# Altium PCB LMAT_AMT_V2.PcbDoc (part 1 of 2)
Units mil, origin at the board's own origin, x right, y up, seen from the top; angles counter-clockwise.
Board outline 1437.01 x 1604.33 mil, 2 copper layers (Top Layer, Bottom Layer), stack 62.192 mil thick; 99 components, 45 nets, 234 pads, 108 vias.
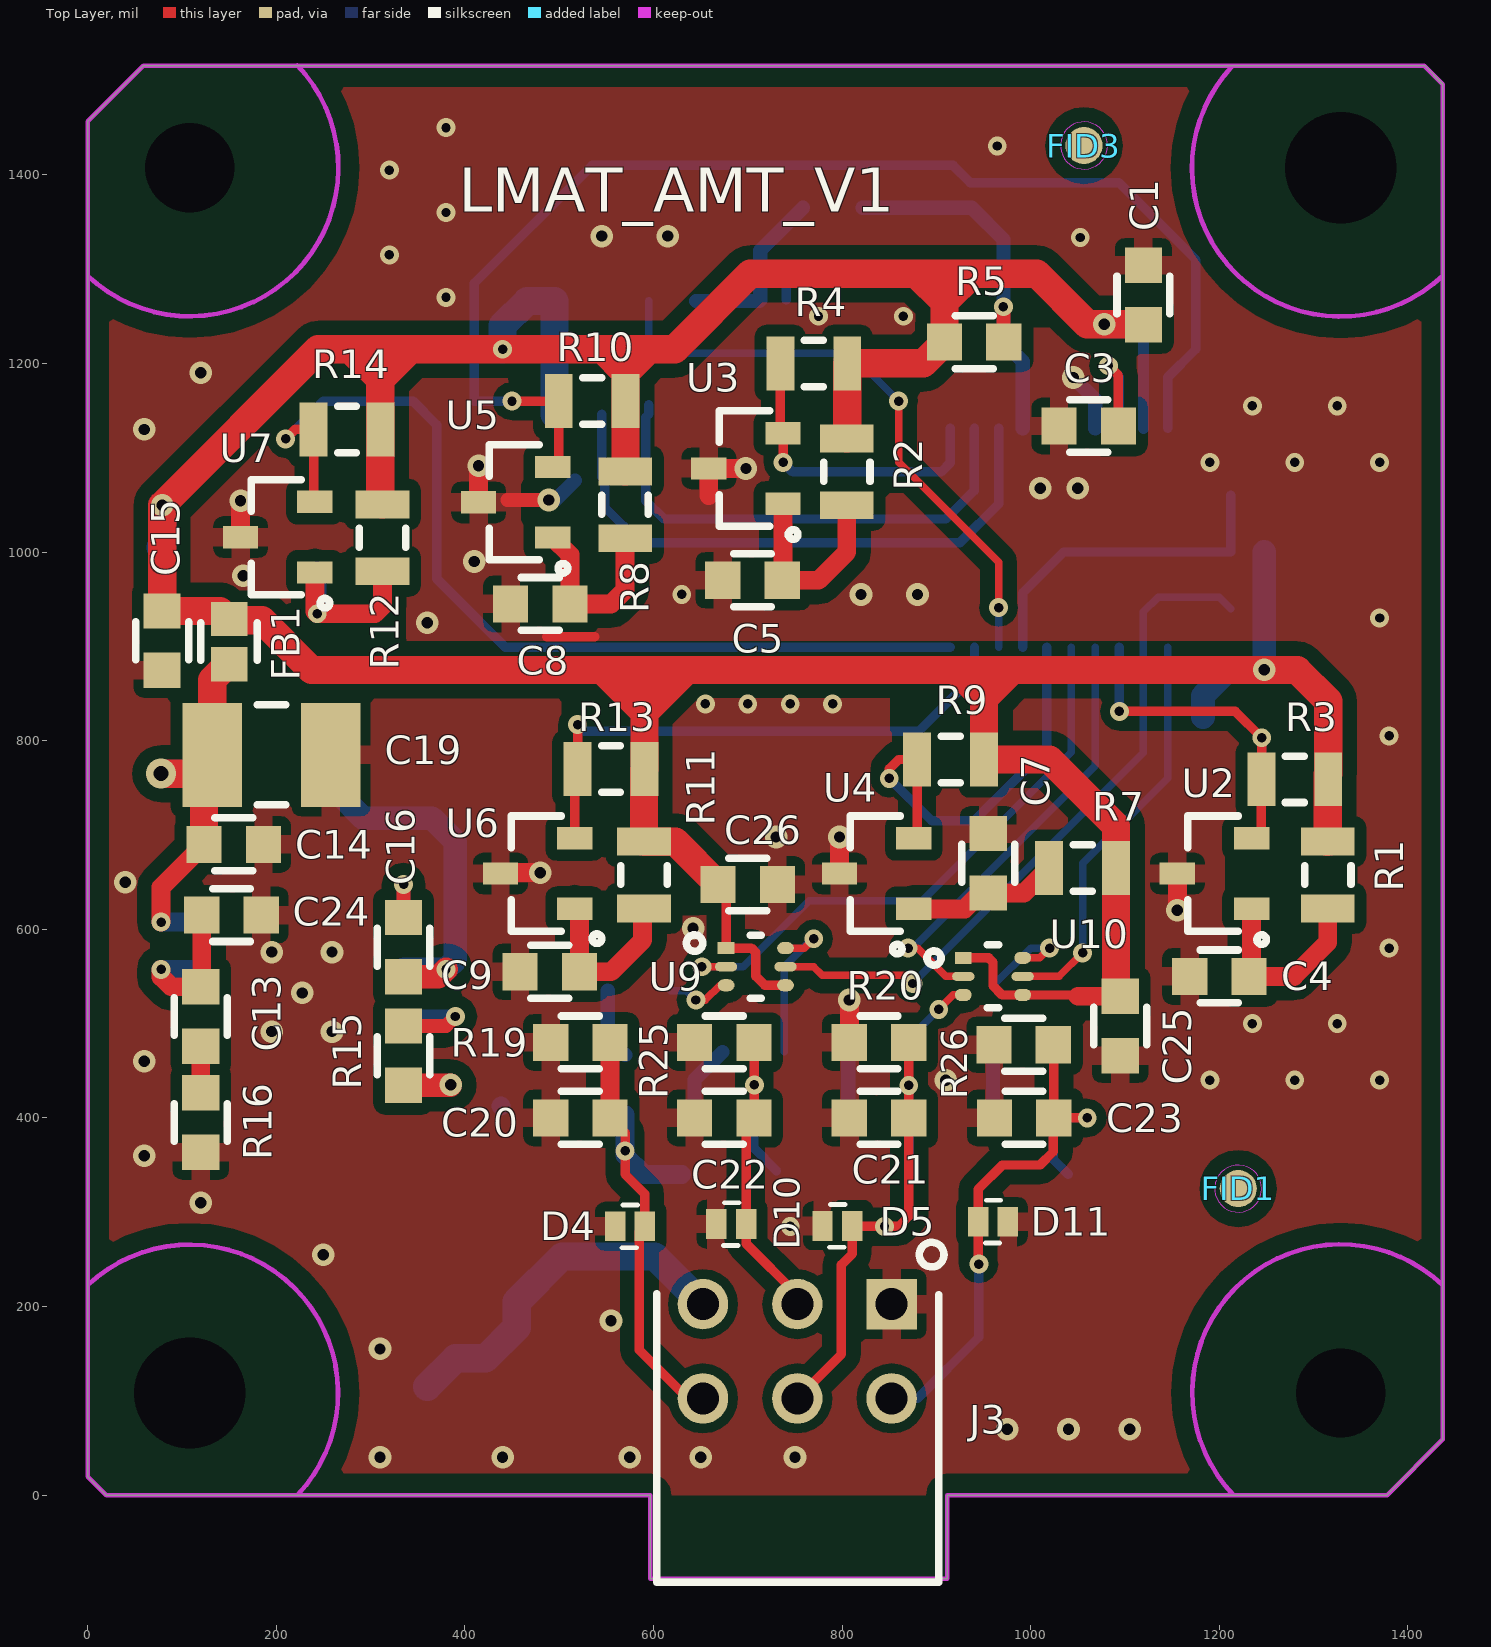
[diagram p0: Top Layer view]
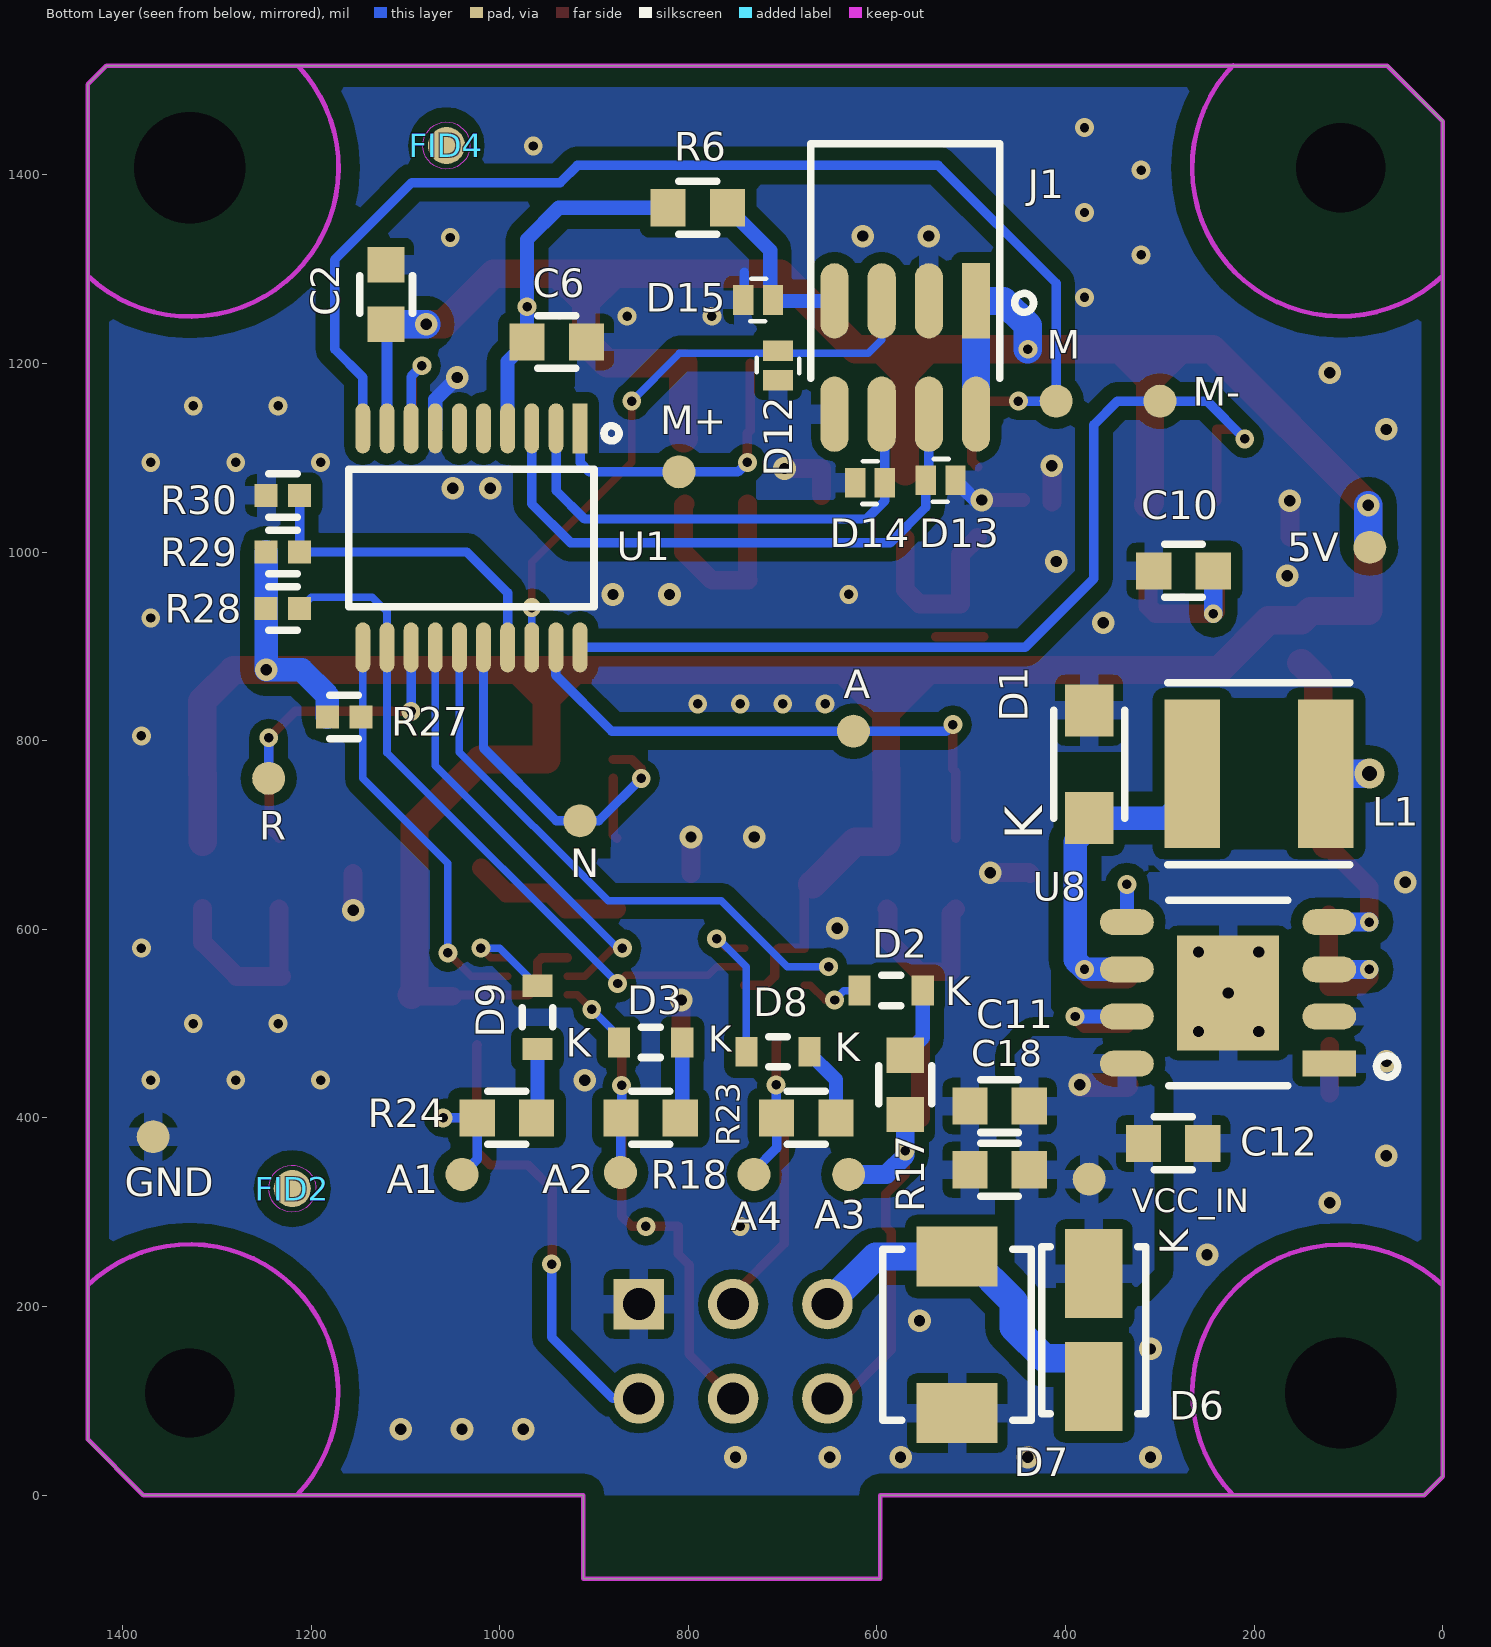
[diagram p1: Bottom Layer view, seen from below]
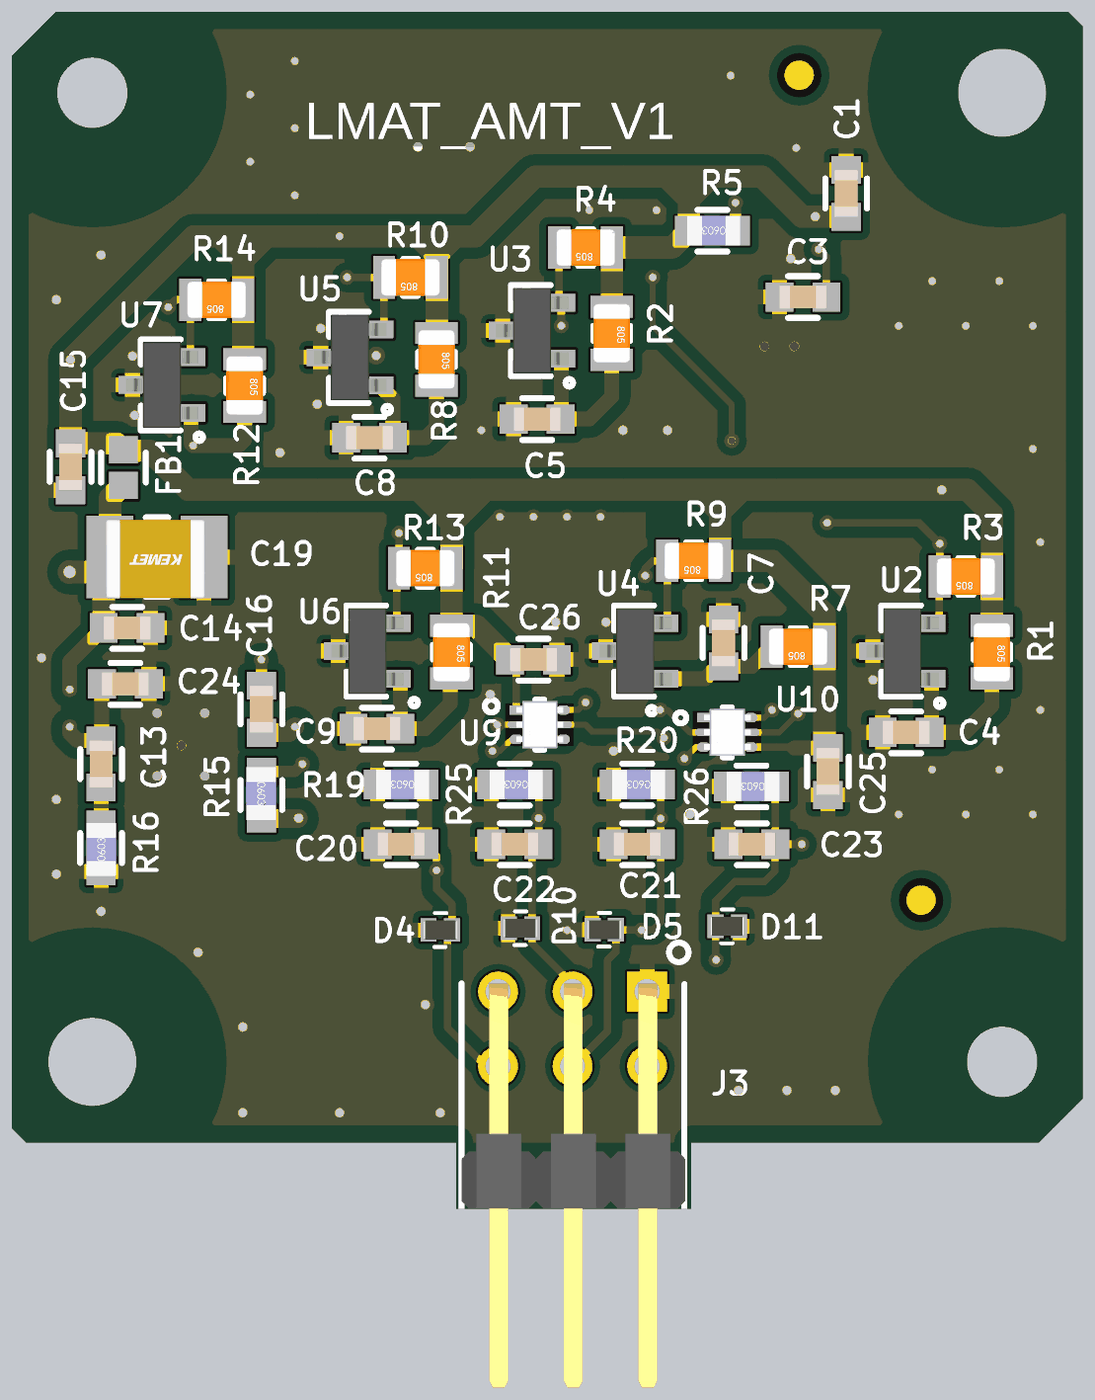
[diagram p3: 3D render of the assembled board from above, using the file's embedded part models]
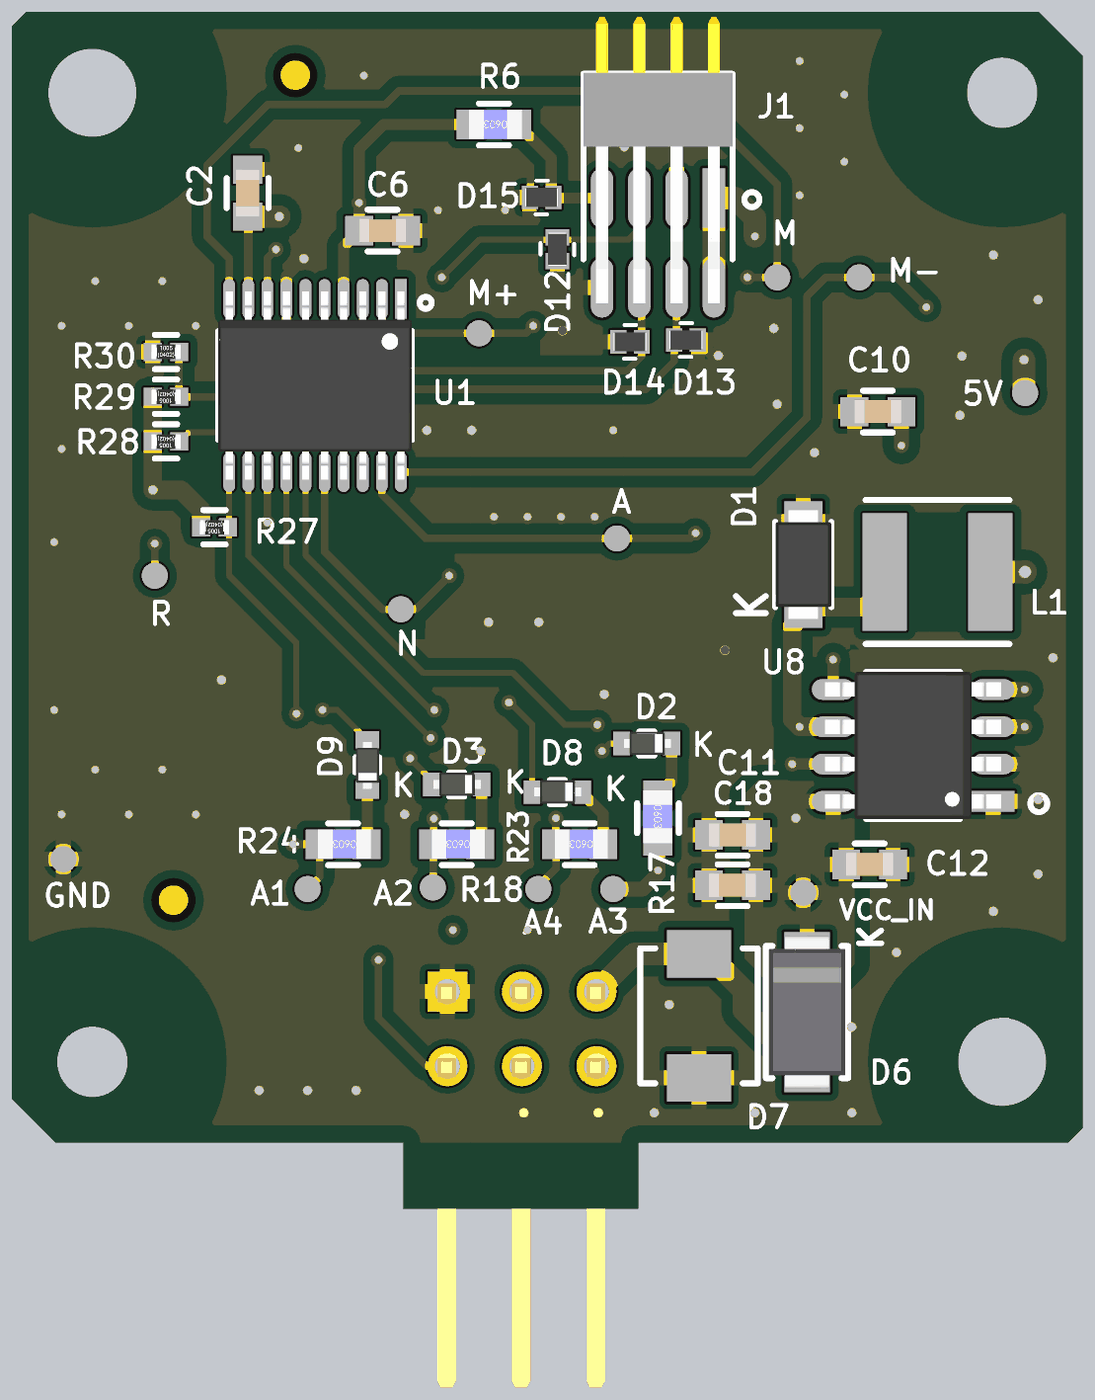
[diagram p4: 3D render of the assembled board from below, using the file's embedded part models]

## Layer stack, top to bottom
Top Solder: solder mask 0.4, Solder Resist, Dk 3.5
Top Layer: signal copper 1.4
Dielectric 1: core 59.392, FR-4, Dk 4.2
Bottom Layer: signal copper 1.4
Bottom solder: solder mask 0.4, Solder Resist, Dk 3.5

## Board outline
0,19.68 19.68,0 596.46,0 596.46,-88.58 911.42,-88.58 911.42,0 1377.95,0 1437.01,59.05 1437.01,1496.06 1417.32,1515.75 59.06,1515.75 0,1456.69

## Design rules (kind name [scope] priority, off if disabled: settings)
AcuteAngle [All] p1: minimum=6.00000000000000E+0001 checktracksonly=TRUE
Clearance Clearance_keepout [(OnLayer('Keep-Out Layer'))] p1: gap=30 ignorepadtopadclearanceinfootprint=TRUE except(0: Arc-Text Arc-Hole Track-Text Track-Hole SMDPad-Text SMDPad-Hole THPad-Text THPad-Hole Via-Text Via-Hole Fill-Text Fill-Hole Poly-Text Poly-Hole Region-Text Region-Hole Text-Text Text-Hole; 10: Arc-Track Arc-SMDPad Arc-THPad Arc-Via Track-Track Track-SMDPad Track-THPad Track-Via SMDPad-Region; 15: Arc-Arc; 20: Arc-Poly Track-Poly; 25: Fill-Fill Poly-Poly)
Clearance [All] p2: gap=15 ignorepadtopadclearanceinfootprint=TRUE except(0: Arc-Hole Track-Hole SMDPad-Hole THPad-Hole Via-Hole Fill-Hole Poly-Hole Region-Hole Text-Hole; 8: Arc-Track Track-SMDPad SMDPad-Via; 10: Track-Track Track-Via Track-Region SMDPad-SMDPad SMDPad-Region THPad-Poly THPad-Region Via-Poly Via-Region; 12: SMDPad-Poly; 20: Poly-Poly)
ComponentClearance [All] p1 off: gap=20 collisioncheckmode=3 verticalgap=20 showdistances=FALSE
FanoutControl Fanout_Default [All] p1: bgadir=Out bgaviamode=Centered fanoutstyle=Auto fanoutdirection=Alternating viagrid=1 // Fanout_Default (Default Rule)
Height Bottom [All] p1: minheight=0 maxheight=216.54 prefheight=196.85
Height TOP [All] p2: minheight=0 maxheight=62.99 prefheight=59.06
Height [All] p3: minheight=0 maxheight=393.7 prefheight=196.85
HoleSize [All] p1: absolutevalues=TRUE maxlimit=1000 minlimit=1 maxpercent=80.000 minpercent=20.000
HoleToHoleClearance [All] p1 off: gap=10 allowstackedmicrovias=TRUE
LayerPairs [All] p1 off: enforce=TRUE
MinimumAnnularRing [All] p1: minimumring=5
MinimumSolderMaskSliver [All] p1: minsoldermaskwidth=3
PolygonConnect PolygonConnect_Via [IsVia] p1: connectstyle=Direct reliefconductorwidth=10 reliefentries=4 polygonreliefangle="90 Angle" airgapwidth=10
PolygonConnect [All] p2: connectstyle=Relief reliefconductorwidth=20 reliefentries=4 polygonreliefangle="90 Angle" airgapwidth=10
RoomDefinition LMAT_AMT_V1 [InComponentClass('LMAT_AMT_V1')] p1: confinementstyle=ConfineIn formatcopy=TRUE lockcomponents=FALSE outline -39778.63,-10384.96 -37778.63,-10384.96 -37778.63,-9384.96 -39778.63,-9384.96
RoutingVias RoutingVias_PWR [InNetClass('PWR')] p1: holewidth=12 width=24 viastyle="Through Hole" minholewidth=12 minwidth=24 maxholewidth=20 maxwidth=40
RoutingVias [All] p2: holewidth=10 width=20 viastyle="Through Hole" minholewidth=10 minwidth=20 maxholewidth=20 maxwidth=40
SilkToSilkClearance [All] p1: silktosilkclearance=2
SilkToSolderMaskClearance [IsPad] p1: minsilkscreentomaskgap=2 clearancetoexposedcopper=TRUE
SolderMaskExpansion [All] p1: expansion=4
UnRoutedNet [All] p1: checkbadconnections=TRUE
UnpouredPolygon [All] p1: allowunpoured=TRUE allowshelved=TRUE
Width [All] p1: maxlimit=200 minlimit=8 preferedwidth=15
15 further rules are at their usual default settings.

## Classes and differential pairs
net class PWR: GND VCC_5V VCC_IN

## Components (designator, comment, footprint, x,y, rotation, side; value= is the part's Value field where it differs from the comment)
5V "Test Point- 35mil" TP_35M_DIA#1 77.5,1005 r180 bottom locked
A "Test Point- 35mil" TP_35M_DIA#2 967.5,1123.58 r180 bottom locked
A1 "Test Point- 35mil" TP_35M_DIA#1 1040,340 r180 bottom locked
A2 "Test Point- 35mil" TP_35M_DIA#1 872,342 r180 bottom locked
A3 "Test Point- 35mil" TP_35M_DIA#1 630,340 r180 bottom locked
A4 "Test Point- 35mil" TP_35M_DIA#1 730.45,340 r180 bottom locked
C1 "CAP CER 0.1UF 50V 10% X7R 0603" SMDC0603 1119.5,1272.5 r90 top locked value=DNP
C2 "CAP CER 1UF 25V X7R 0603" SMDC0603 1120.5,1273 r270 bottom locked value=1µF
C3 "CAP CER 1UF 25V X7R 0603" SMDC0603 1061.48,1133.64 r180 top locked value=1µF
C4 "CAP CER 0.047UF 50V X7R 0603" SMDC0603 1200,550 r0 top locked value=0.047µF
C5 "CAP CER 0.047UF 50V X7R 0603" SMDC0603 705,970 r0 top locked value=0.047µF
C6 "CAP CER 0.1UF 50V 10% X7R 0603" SMDC0603 939.5,1222.68 r180 bottom locked value=0.1uF
C7 "CAP CER 0.047UF 50V X7R 0603" SMDC0603 955,670 r270 top locked value=0.047µF
C8 "CAP CER 0.047UF 50V X7R 0603" SMDC0603 480,945 r0 top locked value=0.047µF
C9 "CAP CER 0.047UF 50V X7R 0603" SMDC0603 490,555 r0 top locked value=0.047µF
C10 "CAP CER 0.047UF 50V X7R 0603" SMDC0603 275,980 r180 bottom locked value=0.047µF
C11 "CAP CER 0.22UF 50V X7R 0603" SMDC0603 470,412.5 r180 bottom locked value=0.22µF
C12 "CAP CER 0.1UF 50V 10% X7R 0603" SMDC0603 286,373 r180 bottom locked value=0.1uF
C13 "CAP CER 0.022UF 50V 10% X7R 0603" SMDC0603 120,507.5 r270 top locked value=0.022uF
C14 "CAP CER 0.22UF 50V X7R 0603" SMDC0603 155,690 r180 top locked value=0.22µF
C15 "CAP CER 0.1UF 50V 10% X7R 0603" SMDC0603 79,906 r270 top locked value=DNP
C16 "CAP CER 0.22UF 50V X7R 0603" SMDC0603 335,581 r270 top locked value=0.22µF
C18 "CAP CER 0.1UF 50V 10% X7R 0603" SMDC0603 470,345 r0 bottom locked value=DNP
C19 "CAP CER 47UF 16V X6S 1210" SMDC1210 195,785 r180 top locked value=47uF
C20 "CAP CER 10000PF 50V X8R 0603" SMDC0603 522.5,400 r0 top locked value=DNP
C21 "CAP CER 10000PF 50V X8R 0603" SMDC0603 839.2,400 r0 top locked value=DNP
C22 "CAP CER 10000PF 50V X8R 0603" SMDC0603 675,400 r0 top locked value=DNP
C23 "CAP CER 10000PF 50V X8R 0603" SMDC0603 993,400 r0 top locked value=DNP
C24 "CAP CER 0.022UF 50V 10% X7R 0603" SMDC0603 152.5,615 r0 top locked value=DNP
C25 "CAP CER 0.1UF 50V 10% X7R 0603" SMDC0603 1095,497.5 r270 top locked value=0.1uF
C26 "CAP CER 0.1UF 50V 10% X7R 0603" SMDC0603 700,647.5 r0 top locked value=0.1uF
D1 "DIODE SCHOTTKY 40V 1A DO-219AB" SODFL370X110-2N 375,775 r90 bottom locked value=SS1FL4HM3/H
D2 "Diode Schottky 30V 100mA Surface Mount EMD2" SOD1700X70N-V2 585,535 r0 bottom locked value=RB501SM-30FHT2R
D3 "Diode Schottky 30V 100mA Surface Mount EMD2" SOD1700X70N-V2 840,480 r0 bottom locked value=RB501SM-30FHT2R
D4 "TVS DIODE 5.5V 14V 2X1SON" DFN65P100X65X45-2N 575,285 r0 top locked value=SZESD7410N2T5G
D5 "TVS DIODE 5.5V 14V 2X1SON" DFN65P100X65X45-2N 795,285.43 r0 top locked value=SZESD7410N2T5G
D6 "DIODE GEN PURP 1KV 1A DO214AC" DIOM4227X23N-2N 370,175 r270 bottom locked value=S1MHE3_A/I
D7 "TVS DIODE 23.1V 48.3V SMB" DIOM4336X26B 515,170 r90 bottom locked value=SM6T27CAY
D8 "Diode Schottky 30V 100mA Surface Mount EMD2" SOD1700X70N-V2 705,470 r0 bottom locked value=RB501SM-30FHT2R
D9 "Diode Schottky 30V 100mA Surface Mount EMD2" SOD1700X70N-V2 960,506.54 r90 bottom locked value=RB501SM-30FHT2R
D10 "TVS DIODE 5.5V 14V 2X1SON" DFN65P100X65X45-2N 682.5,287.43 r0 top locked value=SZESD7410N2T5G
D11 "TVS DIODE 5.5V 14V 2X1SON" DFN65P100X65X45-2N 960,290 r180 top locked value=SZESD7410N2T5G
D12 "TVS DIODE 5.5V 14V 2X1SON" DFN65P100X65X45-2N 705,1197.79 r90 bottom locked value=DNP
D13 "TVS DIODE 5.5V 14V 2X1SON" DFN65P100X65X45-2N 532.5,1076 r0 bottom locked value=DNP
D14 "TVS DIODE 5.5V 14V 2X1SON" DFN65P100X65X45-2N 607.5,1073.5 r180 bottom locked value=DNP
D15 "TVS DIODE 5.5V 14V 2X1SON" DFN65P100X65X45-2N 726,1267.2 r180 bottom locked value=DNP
FB1 "FERRITE BEAD 600 OHM 0603 1LN" SMDL0603 150,905 r90 top locked value=BLM18KG601SH1D
FID1 "FID40X40" FID40X40 1220,325 r90 top locked
FID2 "FID40X40" FID40X40 1220,325 r90 bottom locked
FID3 "FID40X40" FID40X40 1056.5,1431 r90 top locked
FID4 "FID40X40" FID40X40 1056.5,1431 r90 bottom locked
GND "Test Point- 35mil" TP_35M_DIA#1 1367.5,380 r90 bottom locked
J1 "CONN HEADER R/A 6POS 2.54MMCONN HEADER SMD R/A 8POS 1.27MM" HDRRA8W53P127_2X4_9754X251X343P 570,1206.22 r0 bottom locked value=FTSH-104-02-L-DH
J3 "CONN HEADER R/A 6POS 2.54MM" HDRRA6W86P254_2X3_1344X254X528P 752.5,152.5 r180 top locked value=M20-9950345
L1 "FIXED IND 47UH 700MA 422.5 MOHM" INDC4949X310N 195,765 r180 bottom locked value=47UH
M "Test Point- 35mil" TP_35M_DIA#1 410,1160 r90 bottom locked
M+ "Test Point- 35mil" TP_35M_DIA#3 465,770 r90 bottom locked
M- "Test Point- 35mil" TP_35M_DIA#4 1245,760 r90 bottom locked
N "Test Point- 35mil" TP_35M_DIA#1 915,715 r90 bottom locked
R "Test Point- 35mil" TP_35M_DIA#5 295,1160 r180 bottom locked
R1 "RES SMD 100 OHM 1% 1/2W 0805" SMDR0805 1315,657.5 r270 top locked value=100R
R2 "RES SMD 100 OHM 1% 1/2W 0805" SMDR0805 805,1085 r270 top locked value=100R
R3 "RES SMD 1.2K OHM 5% 1/2W 0805" SMDR0805 1280,759 r180 top locked value=1.2K
R4 "RES SMD 1.2K OHM 5% 1/2W 0805" SMDR0805 770,1200 r180 top locked value=1.2K
R5 "RES SMD 47K OHM 1% 1/10W 0603" SMDR0603 940,1222.5 r180 top locked value=47K
R6 "RES SMD 0.0OHM JUMPER 1/10W 0603" SMDR0603 790,1365 r0 bottom locked value=0R
R7 "RES SMD 100 OHM 1% 1/2W 0805" SMDR0805 1055,665 r180 top locked value=100R
R8 "RES SMD 100 OHM 1% 1/2W 0805" SMDR0805 570,1050 r270 top locked value=100R
R9 "RES SMD 1.2K OHM 5% 1/2W 0805" SMDR0805 915,780 r180 top locked value=1.2K
R10 "RES SMD 1.2K OHM 5% 1/2W 0805" SMDR0805 535,1160 r180 top locked value=1.2K
R11 "RES SMD 100 OHM 1% 1/2W 0805" SMDR0805 590,657.5 r270 top locked value=100R
R12 "RES SMD 100 OHM 1% 1/2W 0805" SMDR0805 312.5,1015 r270 top locked value=100R
R13 "RES SMD 1.2K OHM 5% 1/2W 0805" SMDR0805 555,770 r180 top locked value=1.2K
R14 "RES SMD 1.2K OHM 5% 1/2W 0805" SMDR0805 275,1130 r180 top locked value=1.2K
R15 "RES SMD 1M OHM 5% 1/10W 0603" SMDR0603 335,466 r270 top locked value=1M
R16 "RES SMD 22K OHM 1% 1/10W 0603" SMDR0603 120,395 r90 top locked value=22K
R17 "RES SMD 105 OHM 1% 1/10W 0603" SMDR0603 570,435 r270 bottom locked value="105 Ohms"
R18 "RES SMD 105 OHM 1% 1/10W 0603" SMDR0603 840,400 r0 bottom locked value="105 Ohms"
R19 "RES SMD 210 OHM 1% 1/10W 0603" SMDR0603 522.5,480 r180 top locked value="210 Ohms"
R20 "RES SMD 210 OHM 1% 1/10W 0603" SMDR0603 839.2,480 r180 top locked value="210 Ohms"
R23 "RES SMD 105 OHM 1% 1/10W 0603" SMDR0603 675,400 r0 bottom locked value="105 Ohms"
R24 "RES SMD 105 OHM 1% 1/10W 0603" SMDR0603 992.5,400 r0 bottom locked value="105 Ohms"
R25 "RES SMD 210 OHM 1% 1/10W 0603" SMDR0603 675,480 r180 top locked value="210 Ohms"
R26 "RES SMD 210 OHM 1% 1/10W 0603" SMDR0603 992.5,477.5 r180 top locked value="210 Ohms"
R27 "RES SMD 10K OHM 5% 1/10W 0402" SMDR0402 1165,825 r0 bottom locked value=10K
R28 "RES SMD 10K OHM 5% 1/10W 0402" SMDR0402 1230,940 r0 bottom locked value=10K
R29 "RES SMD 4.7K OHM 1% 1/10W 0402" SMDR0402 1230,1000 r0 bottom locked value=4.7K
R30 "RES SMD 4.7K OHM 1% 1/10W 0402" SMDR0402 1230,1060 r180 bottom locked value=DNP
U1 "IC MCU 8BIT 8KB FLASH 20TSSOP" SOP65P640X120-20N 1030,1015 r270 bottom locked value=STM8AF6223PCU
U2 "MAGNETIC SWITCH UNIPOLAR SOT23-3" SOT95P248X115-3N 1194.88,659.06 r180 top locked value=TLE49641MXTSA1
U3 "MAGNETIC SWITCH UNIPOLAR SOT23-3" SOT95P248X115-3N 698.03,1088.58 r180 top locked value=TLE49641MXTSA1
U4 "MAGNETIC SWITCH UNIPOLAR SOT23-3" SOT95P248X115-3N 836.61,659.06 r180 top locked value=TLE49641MXTSA1
U5 "MAGNETIC SWITCH UNIPOLAR SOT23-3" SOT95P248X115-3N 453.94,1052.76 r180 top locked value=TLE49641MXTSA1
U6 "MAGNETIC SWITCH UNIPOLAR SOT23-3" SOT95P248X115-3N 477.17,659.06 r180 top locked value=TLE49641MXTSA1
U7 "MAGNETIC SWITCH UNIPOLAR SOT23-3" SOT95P248X115-3N 201.57,1015.75 r180 top locked value=TLE49641MXTSA1
U8 "IC REG BUCK 5V 1.8A 8DSO" SOIC127P600X170_HS-9N 227.72,532.5 r0 bottom locked value=TLE8366EV50XUMA1
U9 "MOSFET 2P-CH 20V 0.55A SOT666" SOTFL50P160X60-6N 708.5,560.31 r0 top locked value=PMDT670UPE,115
U10 "MOSFET 2P-CH 20V 0.55A SOT666" SOTFL50P160X60-6N 960,550 r0 top locked value=PMDT670UPE,115
VCC_IN "Test Point- 35mil" TP_35M_DIA#1 375,335 r90 bottom locked

## Footprints (in the part's own frame and the unit in brackets; to place one, negate y for a bottom-side part, rotate by r counter-clockwise, add the part's x,y. Pads: shape width x height; smd on the part's side, far side on the other; paste and mask are expansions set on the pad)
DFN65P100X65X45-2N [mm] "DFN, 2-Leads, Body 0.60x1.00mm, Pitch 0.65mm, IPC Medium Density"
  rect 0.55x0.8 smd mask+0.076: 1(-0.4,0) 2(0.4,0)
  silkscreen extent -0.21,-0.58 0.21,0.58, body extent -0.56,-0.32 0.56,0.33, height 0.45
DIOM4227X23N-2N [mm] "Molded Diode, 2-Leads, Body 4.25x2.67mm, IPC Medium Density"
  rect 2.4x1.55 smd: 1(-1.525,0) 2(1.525,0)
  silkscreen extent -2.25,-1.4 2.25,1.4, body extent -2.6,-1.3 2.6,1.3, height 2.4
DIOM4336X26B [mm] "Molded Diode, 2-Leads, Body 4.32x3.63mm, IPC Low Density"
  rect 1.62x2.18 smd: 1(-2.11,0) 2(2.11,0)
  silkscreen extent -2.3,-2 2.3,2, body extent -2.52,-1.97 2.52,1.97, height 2.65
FID40X40 [mm]
  round 1 smd paste-2 mask+0.254: 0(0,0)
  Top Layer keep-out circle w0.025: c0,0 r0.635
HDRRA6W86P254_2X3_1344X254X528P [mm] "CONN HEADER R/A 6POS 2.54MM"
  rect 1.36x1.36 hole 0.86 mask+0.076: 1(-2.54,-1.27)
  round 1.36 hole 0.86 mask+0.076: 2(0,-1.27) 3(2.54,-1.27) 4(-2.54,1.27) 5(0,1.27) 6(2.54,1.27)
  silkscreen extent -3.95,-2.93 3.78,6.22, body extent -3.84,-1.55 3.78,12.21, height 4.54
HDRRA8W53P127_2X4_9754X251X343P [mm] "CONN HEADER SMD R/A 8POS 1.27MM"
  rect 0.76x2.03 smd: 1(-1.905,-1.525)
  oval 0.76x2.03 smd: 2(-1.905,1.525) 3(-0.635,-1.525) 4(-0.635,1.525) 5(0.635,-1.525) 6(0.635,1.525) 7(1.905,-1.525) 8(1.905,1.525)
  silkscreen extent -3.45,-5.76 2.54,0.56, body extent -2.54,-7.7 2.54,2.05, height 3.41
INDC4949X310N [mm] "NRS5030T2R2NMGJ,FIXED IND 6.8UH 2.3A 52 MOHM SMD"
  rect 1.5x4 smd mask+0.076: 1(-1.8,0) 2(1.8,0)
  Top Layer pour cut-out: -0.635,2.032 0.635,2.032 0.635,-2.032 -0.635,-2.032
  silkscreen extent -2.45,-2.45 2.45,2.45, body extent -2.45,-2.45 2.45,2.45, height 3.1
SMDC0603 [mm]
  rect 0.95x1 smd mask+0.076: 1(-0.8,0) 2(0.8,0)
  Top Layer pour cut-out: -0.203,0.559 -0.203,-0.584 0.203,-0.584 0.203,0.559
  silkscreen extent -0.51,-0.71 0.51,0.71, body extent -0.8,-0.4 0.8,0.4, height 0.81
SMDC1210 [mm] "GRM32ER71A476KE15L, CAP CER 47UF 10V X7R 1210"
  rect 1.6x2.8 smd mask+0.076: 1(-1.6,0) 2(1.6,0)
  Top Layer pour cut-out: -0.508,1.35 0.381,1.35 0.381,-1.35 -0.508,-1.35
  silkscreen extent -0.38,-1.35 0.38,1.35, body extent -1.65,-1.29 1.75,1.41, height 1.41
SMDL0603 [mm] "Chip Inductor, 2-Leads, Body 1.60x0.80mm, IPC Medium Density"
  rect 0.92x0.98 smd: 1(-0.61,0) 2(0.61,0)
  silkscreen extent -0.51,-0.76 0.51,0.76, body extent -0.87,-0.48 0.87,0.48, height 1
SMDR0402 [mm]
  rect 0.62x0.62 smd mask+0.076: 1(-0.45,0) 2(0.45,0)
  Top Layer pour cut-out: -0.102,0.381 0.076,0.381 0.076,-0.381 -0.102,-0.381
  silkscreen extent -0.38,-0.58 0.38,0.58, body extent -0.5,-0.25 0.5,0.25, height 0.35
SMDR0603 [mm]
  rect 0.95x1 smd mask+0.076: 1(-0.8,0) 2(0.8,0)
  Top Layer pour cut-out: -0.254,0.61 0.254,0.61 0.254,-0.61 -0.254,-0.61
  silkscreen extent -0.51,-0.71 0.51,0.71, body extent -0.95,-0.5 0.85,0.5, height 0.32
SMDR0805 [mm]
  rect 0.75x1.45 smd mask+0.076: 1(-0.9,0) 2(0.9,0)
  Top Layer pour cut-out: -0.381,0.787 0.406,0.787 0.406,-0.762 0.381,-0.787 -0.381,-0.787
  silkscreen extent -0.25,-0.63 0.25,0.63, body extent -1,-0.63 1,0.63, height 0.78
SOD1700X70N-V2 [mm]
  rect 0.6x0.8 smd mask+0.076: 1(-0.85,0) 2(0.85,0)
  silkscreen extent -0.25,-0.41 0.25,0.41, body extent -0.82,-0.41 0.78,0.39, height 0.7
SODFL370X110-2N [mm] "SODFL, 2-Leads, Body 1.80x3.70mm, IPC Medium Density"
  rect 1.4x1.3 smd: 1(1.45,0) 2(-1.45,0)
  Top Layer pour cut-out: -0.395,-0.95 -0.395,0.95 0.316,0.95 0.316,-0.95
  silkscreen extent -1.45,-0.96 1.45,0.96, body extent -1.85,-0.95 1.85,0.95, height 1.1
SOIC127P600X170_HS-9N [mm] "SOIC, 8-Leads, Body 4.90x3.90mm, Pitch 1.27mm, Thermal Pad 3.10x2.75mm, IPC Medium Density"
  rect 1.45x0.7 smd: 1(-2.725,1.905)
  oval 1.45x0.7 smd: 2(-2.725,0.635) 3(-2.725,-0.635) 4(-2.725,-1.905) 5(2.725,-1.905) 6(2.725,-0.635) 7(2.725,0.635) 8(2.725,1.905)
  rect 2.75x3.1 smd paste-3 mask+0.102: 9(0,0)
  silkscreen extent -4.57,-2.5 1.6,2.5, body extent -3,-2.5 3,2.5, height 1.7
SOP65P640X120-20N [mm] "TSOP, 20-Leads, Body 6.50x4.40mm, Pitch 0.65mm, IPC Medium Density"
  rect 1.35x0.4 smd mask+0.076: 1(-2.95,2.925)
  oval 1.35x0.4 smd mask+0.076: 2(-2.95,2.275) 3(-2.95,1.625) 4(-2.95,0.975) 5(-2.95,0.325) 6(-2.95,-0.325) 7(-2.95,-0.975) 8(-2.95,-1.625) 9(-2.95,-2.275) 10(-2.95,-2.925) 11(2.95,-2.925) 12(2.95,-2.275) 13(2.95,-1.625) 14(2.95,-0.975) 15(2.95,-0.325) 16(2.95,0.325) 17(2.95,0.975) 18(2.95,1.625) 19(2.95,2.275) 20(2.95,2.925)
  silkscreen extent -3.02,-3.3 1.85,3.97, body extent -3.2,-3.3 3.2,3.3, height 1.2
SOT95P248X115-3N [mm] "SOT23, 3-Leads, Body 2.95x2.48mm, Pitch 0.95mm, IPC Medium Density"
  rect 0.95x0.6 smd: 1(-1,0.95) 2(-1,-0.95) 3(1,0)
  silkscreen extent -1.4,-1.55 0.71,1.9, body extent -1.25,-1.46 1.23,1.46, height 1.03
SOTFL50P160X60-6N [mm] "SOTFL, 6-Leads, Body 1.60x1.60mm, Pitch 0.50mm, IPC Medium Density"
  rect 0.45x0.325 smd mask+0.076: 1(-0.8,0.5)
  oval 0.6x0.25 smd mask+0.076: 2(-0.8,0) 5(0.8,0)
  oval 0.45x0.325 smd mask+0.076: 3(-0.8,-0.5) 4(0.8,-0.5) 6(0.8,0.5)
  silkscreen extent -1.87,-0.85 0.15,0.86, body extent -0.8,-0.8 0.8,0.8, height 0.57
TP_35M_DIA#1 [mil]
  round 35 smd mask+3: 1(0,0)
TP_35M_DIA#2 [mil]
  round 35 smd mask+3: 1(342.5,-313.58)
TP_35M_DIA#3 [mil]
  round 35 smd mask+3: 1(315,345)
TP_35M_DIA#4 [mil]
  round 35 smd mask+3: 1(400,-945)
TP_35M_DIA#5 [mil]
  round 35 smd mask+3: 1(-950,-400)

## Part data
5V A A1 A2 A3 A4 GND M M+ M- N R VCC_IN: library part EMS-TP35MIL-S, Internal Part Number=EMS-TP35MIL-S, Part Type="Test Point- 35mil"
C1 C6 C12 C15 C18 C25 C26: library part ECA0U10K50V0-SC, Manufacturer="TDK Corporation", Manufacturer Part Number=CGA3E2X7R1H104K080AA, Temp Co=X7R, Vendor Part Number=445-5666-1-ND, 1st Auxiliary Field=50V, 2nd Auxiliary Field=±10%, 3rd Auxiliary Field="RoHS Compliant", Component Height (mm)=0.90mm, Internal Part Number=ECA0U10K50V0-SC, Part Type="CAP CER 0.1UF 50V X7R 0603", Vendor Name=Digi-Key
C2 C3: library part ECA1U00L25V0-SC, Manufacturer="TDK Corporation", Manufacturer Part Number=CGA3E1X7R1E105K080AE, Temp Co="-55°C ~ 125°C", Vendor Part Number=445-173628-1-ND, 1st Auxiliary Field=25V, 2nd Auxiliary Field=±10%, 3rd Auxiliary Field="RoHS Compliant", Component Height (mm)=0.95mm, Internal Part Number=ECA1U00L25V0-SC, Part Type="CAP CER 1UF 25V X7R 0603", Vendor Name=Digi-Key
C4 C5 C7 C8 C9 C10: library part ECA47N0L50V-SC, Manufacturer="TDK Corporation", Manufacturer Part Number=CGA3E2X7R1H473K080AA, Temp Co="-55°C ~ 125°C", Vendor Part Number=445-5664-1-ND, 1st Auxiliary Field=50V, 2nd Auxiliary Field=±10%, 3rd Auxiliary Field="RoHS Compliant", Component Height (mm)=0.9mm, Internal Part Number=ECA47N0L50V-SC, Part Type="CAP CER 0.047UF 50V X7R 0603", Vendor Name=Digi-Key
C11 C14 C16: library part ECA0U22L50V0-SC, Manufacturer="Murata Electronics North America", Manufacturer Part Number=GCJ188R71H224KA01D, Temp Co="-55°C ~ 125°C", Vendor Part Number=490-14410-1-ND, 1st Auxiliary Field=50V, 2nd Auxiliary Field=±10%, 3rd Auxiliary Field="RoHS Compliant", Component Height (mm)=0.90mm, Internal Part Number=ECA0U22L50V0-SC, Part Type="CAP CER 0.22UF 50V X7R 0603", Vendor Name=Digi-Key
C13 C24: library part ECA0U022K50V0-SC, Manufacturer="TDK Corporation", Manufacturer Part Number=CGA3E2X7R1H223K080AA, Temp Co=X7R, Vendor Part Number=445-5663-1-ND, 1st Auxiliary Field=50V, 2nd Auxiliary Field=±10%, Component Height (mm)=0.90mm, Internal Part Number=ECA0U022K50V0-SC, Part Type="CAP CER 0.022UF 50V X7R 0603", Vendor Name=Digi-Key
C19: library part ECA47U0L16V0-SH, Manufacturer="Murata Electronics North America", Manufacturer Part Number=GRT32EC81C476KE13L, Temp Co="-55°C ~ 105°C", Vendor Part Number=490-12494-1-ND, 1st Auxiliary Field=16V, 2nd Auxiliary Field=±10%, 3rd Auxiliary Field="RoHS Compliant", 4th Auxiliary Field=AEC-Q200, Component Height (mm)=2.70mm, Internal Part Number=ECA47U0L16V0-SH, Part Type="CAP CER 47UF 16V X6S 1210", Vendor Name=Digi-Key
C20 C21 C22 C23: library part ECA0U01L50V0-SC, Manufacturer="TDK Corporation", Manufacturer Part Number=CGA3E2X8R1H103K080AA, Temp Co="-55°C ~ 150°C", Vendor Part Number=445-5892-1-ND, 1st Auxiliary Field=50V, 2nd Auxiliary Field=±10%, 3rd Auxiliary Field="RoHS Compliant", 4th Auxiliary Field=AEC-Q200, Component Height (mm)=0.80mm, Internal Part Number=ECA0U01L50V0-SC, Part Type="CAP CER 10000PF 50V X8R 0603", Vendor Name=Digi-Key
D1: library part EDDVS1A0040V0-S, Manufacturer="Vishay Semiconductor Diodes Division", Manufacturer Part Number=SS1FL4HM3/H, Temp Co="-55°C ~ 150°C", Vendor Part Number=SS1FL4HM3/HGICT-ND, 1st Auxiliary Field=40V, 2nd Auxiliary Field=1A, 3rd Auxiliary Field="RoHS Compliant", Component Height (mm)=1.08mm, Internal Part Number=EDDVS1A0040V0-S, Part Type="DIODE SCHOTTKY 40V 1A DO-219AB", Vendor Name=Digi-Key
D2 D3 D8 D9: library part EDDR0A1030V0-S, Manufacturer="Rohm Semiconductor", Manufacturer Part Number=RB501SM-30FHT2R, Temp Co="125°C (Max)", Vendor Part Number=RB501SM-30FHT2RCT-ND, 1st Auxiliary Field=30V, 2nd Auxiliary Field=100mA, 3rd Auxiliary Field="RoHS Compliant", Component Height (mm)=0.70mm, Internal Part Number=EDDR0A1030V0-S, Part Type="Diode Schottky 30V 100mA Surface Mount EMD2", Vendor Name=Digi-Key
D4 D5 D10 D11 D12 D13 D14 D15: library part EDDOS16A010V0-S, "TVS DIODE 8V 20V 2X2DFN", Manufacturer="ON Semiconductor", Manufacturer Part Number=SZESD7410N2T5G, Temp Co="-55°C ~ 150°C (TJ)", Vendor Part Number=SZESD7410N2T5GOSCT-ND, 1st Auxiliary Field=10V, 2nd Auxiliary Field=16A, 3rd Auxiliary Field="RoHS Compliant", 4th Auxiliary Field=AEC-Q101, Component Height (mm)=0.40mm, Internal Part Number=EDDOS16A010V0-S, Part Type="TVS DIODE 8V 20V 2X2DFN", Vendor Name=Digi-Key
D6: library part EDDVS1A001000V-S, Manufacturer="Vishay Semiconductor Diodes Division", Manufacturer Part Number=S1MHE3_A/I, Temp Co="-55°C ~ 150°C", Vendor Part Number=S1MHE3_A/IGICT-ND, 1st Auxiliary Field=1000V, 2nd Auxiliary Field=1A, 3rd Auxiliary Field="RoHS Compliant", Component Height (mm)=2.29mm, Internal Part Number=EDDVS1A001000V-S, Part Type="DIODE GEN PURP 1KV 1A DO214AC", Vendor Name=Digi-Key
D7: library part EDDST83A025V7-S, Manufacturer=STMicroelectronics, Manufacturer Part Number=SM6T27CAY, Temp Co="-55°C ~ 150°C (TJ)", Vendor Part Number=497-10798-1-ND, 1st Auxiliary Field=25.7V, 2nd Auxiliary Field=600W, 3rd Auxiliary Field="RoHS Compliant", Component Height (mm)=2.65mm, Internal Part Number=EDDST83A025V7-S, Part Type="TVS DIODE 23.1V 48.3V SMB", Vendor Name=Digi-Key
FB1: library part EIN600R1A30-S, Manufacturer="Murata Electronics North America", Manufacturer Part Number=BLM18KG601SH1D, Temp Co="-55°C ~ 125°C", Vendor Part Number=490-13259-1-ND, 1st Auxiliary Field="150 mOhm", 2nd Auxiliary Field=1.3A, 3rd Auxiliary Field="RoHS Compliant", 4th Auxiliary Field=AEC-Q200, Component Height (mm)=0.95mm, Internal Part Number=EIN600R1A30-S, Part Type="FERRITE BEAD 600 OHM 0603 1LN", Vendor Name=Digi-Key
FID1 FID2 FID3 FID4: library part FID_40X40
J1: library part ECN-FTSH-104-02-L-DH-0005, "CONN HEADER SMD R/A 8POS 1.27MM", Manufacturer="Samtec Inc.", Manufacturer Part Number=FTSH-104-02-L-DH, Temp Co="-55°C ~ 125°C", Vendor Part Number=SAM11248-ND, 1st Auxiliary Field=8POS, 2nd Auxiliary Field="2 rows", 3rd Auxiliary Field="RoHS Compliant", Component Height (mm)=3.43mm, Internal Part Number=ECN-FTSH-104-02-L-DH-0005, Part Type="CONN HEADER SMD R/A 8POS 1.27MM", Vendor Name=Digi-Key
J3: library part ECN-M20-9950345-0003, Manufacturer="Harwin Inc.", Manufacturer Part Number=M20-9950345, Temp Co="-40°C ~ 105°C", Vendor Part Number=952-2092-ND, 1st Auxiliary Field=6pos, 2nd Auxiliary Field="2 rows", 3rd Auxiliary Field="RoHS Compliant", Component Height (mm)=5.08mm, Internal Part Number=ECN-M20-9950345-0003, Part Type="CONN HEADER R/A 6POS 2.54MM", Vendor Name=Digi-Key
L1: library part EIN47U0N950M-S, Manufacturer="Taiyo Yuden", Manufacturer Part Number=NRS5030T470MMGJV, Temp Co="-40°C ~ 125°C", Vendor Part Number=587-3604-1-ND, 1st Auxiliary Field=950mA, 2nd Auxiliary Field=±20%, 3rd Auxiliary Field="RoHS Compliant", 4th Auxiliary Field=AEC-Q200, Component Height (mm)=3.00mm, Internal Part Number=EIN47U0N950M-S, Part Type="FIXED IND 47UH 700MA 422.5 MOHM", Vendor Name=Digi-Key
R1 R2 R7 R8 R11 R12: library part ERE100RG120-SE, Manufacturer="Panasonic Electronic Components", Manufacturer Part Number=ERJ-P06F1000V, Temp Co="-55°C ~ 155°C", Vendor Part Number=P16057CT-ND, 1st Auxiliary Field=0.5W, 2nd Auxiliary Field=±1%, 3rd Auxiliary Field="RoHS Compliant", 4th Auxiliary Field=AEC-Q200, Component Height (mm)=0.70mm, Internal Part Number=ERE100RG120-SE, Part Type="RES SMD 100 OHM 1% 1/2W 0805", Vendor Name=Digi-Key
R3 R4 R9 R10 R13 R14: library part ERE1K20G102-SE, Manufacturer="Panasonic Electronic Components", Manufacturer Part Number=ERJ-P06J122V, Temp Co="-55°C ~ 155°C", Vendor Part Number=P1.2KADCT-ND, 1st Auxiliary Field=0.5W, 2nd Auxiliary Field=±5%, 3rd Auxiliary Field="RoHS Compliant", Component Height (mm)=0.70mm, Internal Part Number=ERE1K20G102-SE, Part Type="RES SMD 1.2K OHM 5% 1/2W 0805", Vendor Name=Digi-Key
R5: library part ERE47K0G110-SC, Manufacturer=Yageo, Manufacturer Part Number=AT0603FRE0747KL, Temp Co="-55°C ~ 155°C", Vendor Part Number=YAG2129CT-ND, 1st Auxiliary Field=0.1W, 2nd Auxiliary Field=±1%, 3rd Auxiliary Field="RoHS Compliant", Component Height (mm)=0.55mm, Internal Part Number=ERE47K0G110-SC, Part Type="RES SMD 47K OHM 1% 1/10W 0603", Vendor Name=Digi-Key
R6: library part ERE0R00110-SC, Manufacturer="Panasonic Electronic Components", Manufacturer Part Number=ERJ-3GEY0R00V, Vendor Part Number=P0.0GCT-ND, 1st Auxiliary Field=0.1W, 2nd Auxiliary Field=Jumper, Component Height (mm)=0.55mm, Internal Part Number=ERE0R00110-SC, Part Type="RES SMD 0.0OHM JUMPER 1/10W 0603", Vendor Name=Digi-Key
R15: library part ERE1M00K110-SC, Manufacturer="Vishay Dale", Manufacturer Part Number=RCA06031M00JNEA, Temp Co="-55°C ~ 155°C", Vendor Part Number=541-2216-1-ND, 1st Auxiliary Field=0.1W, 2nd Auxiliary Field=±5%, 3rd Auxiliary Field="RoHS Compliant", 4th Auxiliary Field=AEC-Q200, Component Height (mm)=0.50mm, Internal Part Number=ERE1M00K110-SC, Part Type="RES SMD 1M OHM 5% 1/10W 0603", Vendor Name=Digi-Key
R16: library part ERE22K0G110-SC, Manufacturer="Panasonic Electronic Components", Manufacturer Part Number=ERJ-3EKF2202V, Temp Co="-55°C ~ 155°C", Vendor Part Number=P22.0KHCT-ND, 1st Auxiliary Field=0.1W, 2nd Auxiliary Field=±1%, 3rd Auxiliary Field="RoHS Compliant", 4th Auxiliary Field=AEC-Q200, Component Height (mm)=0.55mm, Internal Part Number=ERE22K0G110-SC, Part Type="RES SMD 22K OHM 1% 1/10W 0603", Vendor Name=Digi-Key
R17 R18 R23 R24: library part ERE105RG110-SC, Manufacturer="Panasonic Electronic Components", Manufacturer Part Number=ERJ-3EKF1050V, Temp Co="-55°C ~ 155°C", Vendor Part Number=P105HCT-ND, 1st Auxiliary Field=0.1W, 2nd Auxiliary Field=±1%, 3rd Auxiliary Field="RoHS Compliant", 4th Auxiliary Field=AEC-Q200, Component Height (mm)=0.55mm, Internal Part Number=ERE105RG110-SC, Part Type="RES SMD 105 OHM 1% 1/10W 0603", Vendor Name=Digi-Key
R19 R20 R25 R26: library part ERE210RG110-SC, Manufacturer="Panasonic Electronic Components", Manufacturer Part Number=ERJ-3EKF2100V, Temp Co="-55°C ~ 155°C", Vendor Part Number=P210HCT-ND, 1st Auxiliary Field=0.1W, 2nd Auxiliary Field=±1%, 3rd Auxiliary Field="RoHS Compliant", 4th Auxiliary Field=AEC-Q200, Component Height (mm)=0.55mm, Internal Part Number=ERE210RG110-SC, Part Type="RES SMD 210 OHM 1% 1/10W 0603", Vendor Name=Digi-Key
R27 R28: library part ERE10K0K110-SB, Manufacturer="Panasonic Electronic Components", Manufacturer Part Number=ERJ-2GEJ103X, Temp Co=±200ppm/°C, Vendor Part Number=P10KJCT-ND, 1st Auxiliary Field=0.1W, 2nd Auxiliary Field=±5%, 3rd Auxiliary Field="RoHS Compliant", Component Height (mm)=0.40mm, Internal Part Number=ERE10K0K110-SB, Part Type="RES SMD 10K OHM 5% 1/10W 0402", Vendor Name=Digi-Key
R29 R30: library part ERE4K70G110-SB, Alternate Part Number=RK73H1ETTP4701F, Manufacturer="Panasonic Electronic Components", Manufacturer Part Number=ERJ-2RKF4701X, Temp Co=±100ppm/°C, Vendor Part Number=P4.70KLCT-ND, 1st Auxiliary Field=0.1W, 2nd Auxiliary Field=±1%, 3rd Auxiliary Field="RoHS Compliant", 4th Auxiliary Field=AEC-Q200, Component Height (mm)=0.40mm, Internal Part Number=ERE4K70G110-SB, Part Type="RES SMD 4.7K OHM 1% 1/10W 0402", Vendor Name=Digi-Key
U1: library part EICSTMTSSOP-20-1691, Manufacturer=STMicroelectronics, Manufacturer Part Number=STM8AF6223PCU, Temp Co="-40°C ~ 125°C (TA)", Vendor Part Number=497-17896-ND, 1st Auxiliary Field="3V ~ 5.5V", 2nd Auxiliary Field=8-Bit, 3rd Auxiliary Field="RoHS Compliant", Component Height (mm)=1.2mm, Internal Part Number=EICSTMTSSOP-20-1691, Part Type="IC MCU 8BIT 8KB FLASH 20TSSOP", Vendor Name=Digi-Key
U2 U3 U4 U5 U6 U7: library part EICITSOT23-3-1528, Manufacturer="Infineon Technologies", Manufacturer Part Number=TLE49641MXTSA1, Temp Co="-40°C ~ 170°C (TJ)", Vendor Part Number=TLE49641MXTSA1CT-ND, 1st Auxiliary Field="3 V ~ 32 V", 2nd Auxiliary Field=2.5mA, 3rd Auxiliary Field="RoHS Compliant", Component Height (mm)=1.15mm, Internal Part Number=EICITSOT23-3-1528, Part Type="MAGNETIC SWITCH UNIPOLAR SOT23-3", Vendor Name=Digi-Key
U8: library part EICITSOIC-08-0001, Manufacturer="Infineon Technologies", Manufacturer Part Number=TLE8366EV50XUMA1, Temp Co="-40°C ~ 150°C (TJ)", Vendor Part Number=TLE8366EV50XUMA1CT-ND, 1st Auxiliary Field=45V, 2nd Auxiliary Field=1.8A, 3rd Auxiliary Field="RoHS Compliant", 4th Auxiliary Field=AEC-Q100, Component Height (mm)=1.7mm, Internal Part Number=EICITSOIC-08-0001, Part Type="IC REG BUCK 5V 1.8A 8DSO", Vendor Name=Digi-Key
U9 U10: library part EICNUSOT666-06-0004, Manufacturer="Nexperia USA Inc.", Manufacturer Part Number=PMDT670UPE,115, Temp Co="-55°C ~ 150°C (TJ)", Vendor Part Number=1727-1334-1-ND, 1st Auxiliary Field=20V, 2nd Auxiliary Field=550mA, 3rd Auxiliary Field="RoHS Compliant", 4th Auxiliary Field=AEC-Q101, Component Height (mm)=0.6mm, Internal Part Number=EICNUSOT666-06-0004, Part Type="MOSFET 2P-CH 20V 0.55A SOT666", Vendor Name=Digi-Key

## Free pads (board coordinates)
  round 4 hole 118.11 unplated: MH(108.27,108.27) MH(1328.74,1407.48)
  round 4 hole 94.49 unplated: MH(108.27,1407.48) MH(1328.74,108.27)

## Via types
v1: diameter 20, hole 10, Top Layer to Bottom Layer, tented both sides, 60 vias
v2: diameter 24, hole 12, Top Layer to Bottom Layer, tented both sides, 47 vias
v3: diameter 32, hole 16, Top Layer to Bottom Layer, tented both sides, 1 vias

## Nets (pads, with @x,y where several pads share a name; then routed paths per layer and width w, separated by ;. In a path a pad name is that pad's centre, name@x,y a point inside that pad or via, vN(x,y) a via of type N, cw(c..) or ccw(c..) an arc to the next point about the centre after c; other vN are vias at no path point)
AUTOMATIC: A.1 R13.2 U1.19 U6.2 | length 599.9
  Top Layer w10: U6.2@516.54,696.46 516.54,766.97 R13.2@519.57,770 v1(519.57,817.07)
  Bottom Layer w10: v1(519.57,817.07) 526.63,810 A.1@625,810 881.3,810 940.43,869.14 U1.19@940.43,898.86
DEBUG: R29.1 R30.2 U1.17 | length 356.4
  Bottom Layer w10: U1.17@991.61,898.86 991.61,956.61 1035,1000 R29.1@1212.28,1000 R30.2@1212.28,1060
GND: C1.2 C2.1 C3.2 C4.1 C5.1 C6.2 C7.1 C8.1 C9.1 C10.1 C11.1 C12.2 C14.1 C15.2 C18.2 C19.1 C20.1 C21.1 C22.1 C23.1 C24.2 C25.2 C26.2 D1.1 D4.1 D5.1 D7.1 D10.1 D11.1 D12.1 D13.1 D14.1 D15.1 GND.1 J1.3 J1.8 J3.1 R16.1 R19.2 R20.2 R25.2 R26.2 R30.1 U1.7 U2.3 U3.3 U4.3 U5.3 U6.3 U7.3 U8.1 U8.2 U8.9 | length 534.9
  Top Layer w10: 445,1055 445.18,1055.18 ; 486.94,910.19 537.7,910.19
  Top Layer w15: 445.18,1055.18 v2(489,1055.18)
  Top Layer w20: U7.3@162.21,1015.75 v2(162.21,1054.49) ; U5.3@414.57,1052.76 v2(414.57,1091.5) ; U6.3@437.79,659.06 438.74,660 v2(480,660) ; 658.66,1060 U3.3@658.66,1088.58 v2(698.03,1088.58) ; U4.3@797.24,659.05 v2(797.24,697.79) ; v2(807.5,525) 807.7,524.8 R20.2@807.7,480 ; v2(1155.51,620.32) U2.3@1155.51,659.06
  Bottom Layer w10: D15.1@740.8,1267.2 740.8,1296.8
  Bottom Layer w15: v2(489,1055.18) 495.93,1055.18 D13.1@516.75,1076 ; v2(1045,1185) 1068.39,1161.61 U1.7@1068.39,1131.14
  other v1: 745,285 1190,440 1280,440 1370,440 1235,500 1325,500 1380,580 1380,805 655,839 700,839 745,839 790,839 1370,930 630,955 1190,1095 1280,1095 1370,1095 1235,1155 1325,1155 775,1250 865,1250 380,1270 320,1315 1052.5,1333.5 380,1360 320,1405 964.5,1430.5 380,1450
  other v2: 310,40 440,40 575,40 650,40 750,40 975,70 1040,70 1105,70 310,155 555,185 250,255 120,310 60,360 910,440 60,460 195.13,491.5 259.13,491.5 227.72,532.5 195.13,575.81 259.13,575.81 642,601 40,650 730,697.79 360,925 820,955 880,955 165,975 410,990 1010,1067.5 1050,1067.5 60,1130 120,1190 545,1335 615,1335
M+: M+.1 R4.2 U1.1 U3.2 | length 328.1
  Top Layer w10: R4.2@734.57,1200 734.57,1128.82 U3.2@737.4,1125.98 v1(737.4,1095.1)
  Bottom Layer w10: v1(737.4,1095.1) 747.5,1085 905.08,1085 914.84,1094.76 U1.1@914.84,1131.14
M-: M-.1 R14.2 U1.20 U7.2 | length 1036.3
  Top Layer w10: v1(210,1120) 220,1130 R14.2@239.57,1130 239.57,1054.53 U7.2@240.95,1053.15
  Bottom Layer w10: v1(210,1120) 250,1160 M-.1@300,1160 345,1160 370,1135 370,971.8 442.94,898.86 U1.20@914.84,898.86
MANUAL: M.1 R10.2 U1.10 U5.2 | length 1336.4
  Top Layer w10: v1(450,1160) R10.2@499.57,1160 499.57,1096.42 U5.2@493.31,1090.16
  Bottom Layer w10: v1(450,1160) M.1@410,1160 410,1285 535,1410 917.69,1410 935.94,1391.75 1093.25,1391.75 1175,1310 1175,1215 1145.16,1185.16 U1.10@1145.16,1131.14
NetC3_1: C3.1 U1.8 | length 139.3
  Top Layer w10: v1(1082.5,1197.5) 1092.97,1187.03 C3.1@1092.97,1133.64
  Bottom Layer w10: v1(1082.5,1197.5) 1093.98,1186.02 U1.8@1093.98,1131.14
NetC4_2: C4.2 R1.2 U2.1 | length 207.3
  Top Layer w20: U2.1@1234.25,621.65 1234.25,552.75 C4.2@1231.5,550 1279,550 1315,586 R1.2@1315,622.07
NetC5_2: C5.2 R2.2 U3.1 | length 214.3
  Top Layer w20: U3.1@737.4,1051.18 737.4,970.91 C5.2@736.5,970 775,970 805,1000 R2.2@805,1049.57 R2.2@803.39,1051.18
NetC7_2: C7.2 R7.2 U4.1 | length 161.5
  Top Layer w20: U4.1@875.98,621.65 930,621.65 946.85,638.5 C7.2@955,638.5 993.07,638.5 R7.2@1019.57,665
NetC8_2: C8.2 R8.2 U5.1 | length 197.2
  Top Layer w20: U5.1@493.31,1015.35 511.5,997.17 C8.2@511.5,945 555,945 570,960 R8.2@570,1014.57
NetC9_2: C9.2 R11.2 U6.1 | length 183.2
  Top Layer w20: U6.1@516.54,621.65 521.5,616.69 C9.2@521.5,555 555,555 588.5,588.5 588.5,620.57 R11.2@589.59,621.65
NetC10_2: C10.2 R12.2 U7.1 | length 199.8
  Top Layer w20: U7.1@240.95,978.35 240.95,937.06 v1(243.5,934.5) 304.5,934.5 312.5,942.5 R12.2@312.5,979.57
  Bottom Layer w20: v1(243.5,934.5) C10.2@243.5,980
NetC13_1: C13.1 C24.1 U8.3 | length 173.5
  Top Layer w20: v1(78,557.5) 78,549.5 88.5,539 C13.1@120,539 120.43,539 121,539.57 C24.1@121,615
  Bottom Layer w20: v1(78,557.5) U8.3@120.43,557.5
NetC13_2: C13.2 R16.2 | length 49.5
  Top Layer w20: R16.2@120,426.5 C13.2@120,476
NetC14_2: C14.2 C19.2 FB1.1 L1.2 U8.4 | length 444.1
  Top Layer w20: v1(78,607.5) 78,644.5 C14.2@123.5,690
  Top Layer w30: v3(77.7,765) 112.01,765 C19.2@123.5,776.5 ; C14.2@123.5,690 C19.2@123.5,776.5 ; FB1.1@150,882.37 132.01,864.38 C19.2@132.01,785 C19.2@123.5,776.5
  Bottom Layer w20: v1(78,607.5) U8.4@120.43,607.5
  Bottom Layer w30: v3(77.7,765) L1.2@124.13,765
NetC16_1: C16.1 U8.5 | length 75
  Top Layer w15: C16.1@335,612.5 v1(335,647.5)
  Bottom Layer w15: U8.5@335,607.5 v1(335,647.5)
NetC16_2: C16.2 D1.2 L1.1 U8.6 | length 399.1
  Top Layer w25: C16.2@335,549.5 372,549.5 v1(380,557.5)
  Bottom Layer w25: L1.1@265.87,765 265.87,744.13 292.09,717.91 365,717.91 390,692.91 390,567.5 v1(380,557.5) U8.6@335,557.5
NetD2_1: D2.1 R17.1 | length 76.2
  Bottom Layer w15: D2.1@551.54,535 551.54,484.96 R17.1@570,466.5
NetD2_2: D2.2 U9.3 | length 69.2
  Top Layer w8: v1(645,525) 655.01,525 670.64,540.63 U9.3@677.01,540.63
  Bottom Layer w8: D2.2@618.46,535 635,535 v1(645,525)
NetD3_1: D3.1 R18.1 | length 80.8
  Bottom Layer w15: D3.1@806.54,480 806.54,401.97 R18.1@808.5,400
NetD3_2: D3.2 U10.3 | length 79.4
  Top Layer w8: v1(902.5,515) 917.81,530.31 U10.3@928.5,530.31
  Bottom Layer w8: D3.2@873.46,480 873.46,485.96 v1(902.5,515)
NetD6_2: D6.2 D7.2 J3.3 | length 386.5
  Bottom Layer w30: D6.2@360,114.96 390.04,145 422,145 455,178 455,205 503.07,253.07 D7.2@515,253.07 601.57,253.07 652.14,202.5 J3.3@652.5,202.5
NetD8_1: D8.1 R23.1 | length 82.2
  Bottom Layer w15: R23.1@643.5,400 643.5,440.47 D8.1@673.03,470
NetD8_2: D8.2 U9.6 | length 168.3
  Top Layer w8: U9.6@740,580 760,580 v1(770,590)
  Bottom Layer w8: D8.2@738.46,470 738.46,560.31 768.15,590 v1(770,590)
NetD9_1: D9.1 R24.1 | length 73.5
  Bottom Layer w15: D9.1@960,473.07 960,401 R24.1@961,400
NetD9_2: D9.2 U10.6 | length 109.3
  Top Layer w8: U10.6@991.5,569.68 1009.68,569.68 v1(1020,580)
  Bottom Layer w8: D9.2@960,540 1000,580 v1(1020,580)
NetD15_2: D15.2 J1.7 R6.1 | length 185.2
  Bottom Layer w8: D15.2@712.26,1266.26 D15.2@713.21,1267.2
  Bottom Layer w15: J1.7@645,1266.26 D15.2@712.26,1266.26 ; D15.2@713.21,1267.2 713.21,1319.7 R6.1@758.5,1365
NetR15_1: R15.1 U8.7 | length 114.1
  Top Layer w15: R15.1@335,497.5 380,497.5 v1(390,507.5)
  Bottom Layer w15: U8.7@335,507.5 v1(390,507.5)
NEUTRAL: N.1 R9.2 U1.16 U4.2 | length 433.2
  Top Layer w10: v1(850,760) 850,770 860,780 R9.2@879.57,780 ; U4.2@875.98,696.46 879.57,700.04 R9.2@879.57,760
  Bottom Layer w10: v1(850,760) 895,715 N.1@915,715 940,715 1017.2,792.2 U1.16@1017.2,898.86
nRESET: C6.1 R5.1 R6.2 U1.4 | length 410
  Top Layer w10: R5.1@970.99,1223 R5.1@971.5,1222.5
  Top Layer w15: R5.1@970.99,1223 v1(970.99,1260)
  Bottom Layer w15: R6.2@821.5,1365 937.5,1365 970.99,1331.51 v1(970.99,1260) C6.1@970.99,1222.68 991.61,1202.06 U1.4@991.61,1131.14
REVERSE: R3.2 R.1 U1.13 U2.2 | length 381.5
  Top Layer w10: v1(1093.98,831.02) 1216.98,831.02 v1(1245,803) ; U2.2@1234.25,696.46 1244.57,706.77 R3.2@1244.57,759 1245,759.43 v1@1245,800
  Bottom Layer w10: v1(1093.98,831.02) U1.13@1093.98,898.86 ; R.1@1245,760 v1(1245,803)
S1: U1.14 U10.2 | length 482
  Top Layer w8: v1(870,580) 880,580 910,550 U10.2@928.5,550
  Bottom Layer w8: v1(870,580) 870,575 1068.39,773.39 U1.14@1068.39,898.86